# Altium PCB Atari_Controller.PcbDoc
Units mm, origin at the board's own origin, x right, y up, seen from the top; angles counter-clockwise.
Board outline 108.57 x 40.1 mm, 2 copper layers (Top Layer, Bottom Layer); 99 components, 57 nets, 285 pads, 144 vias.
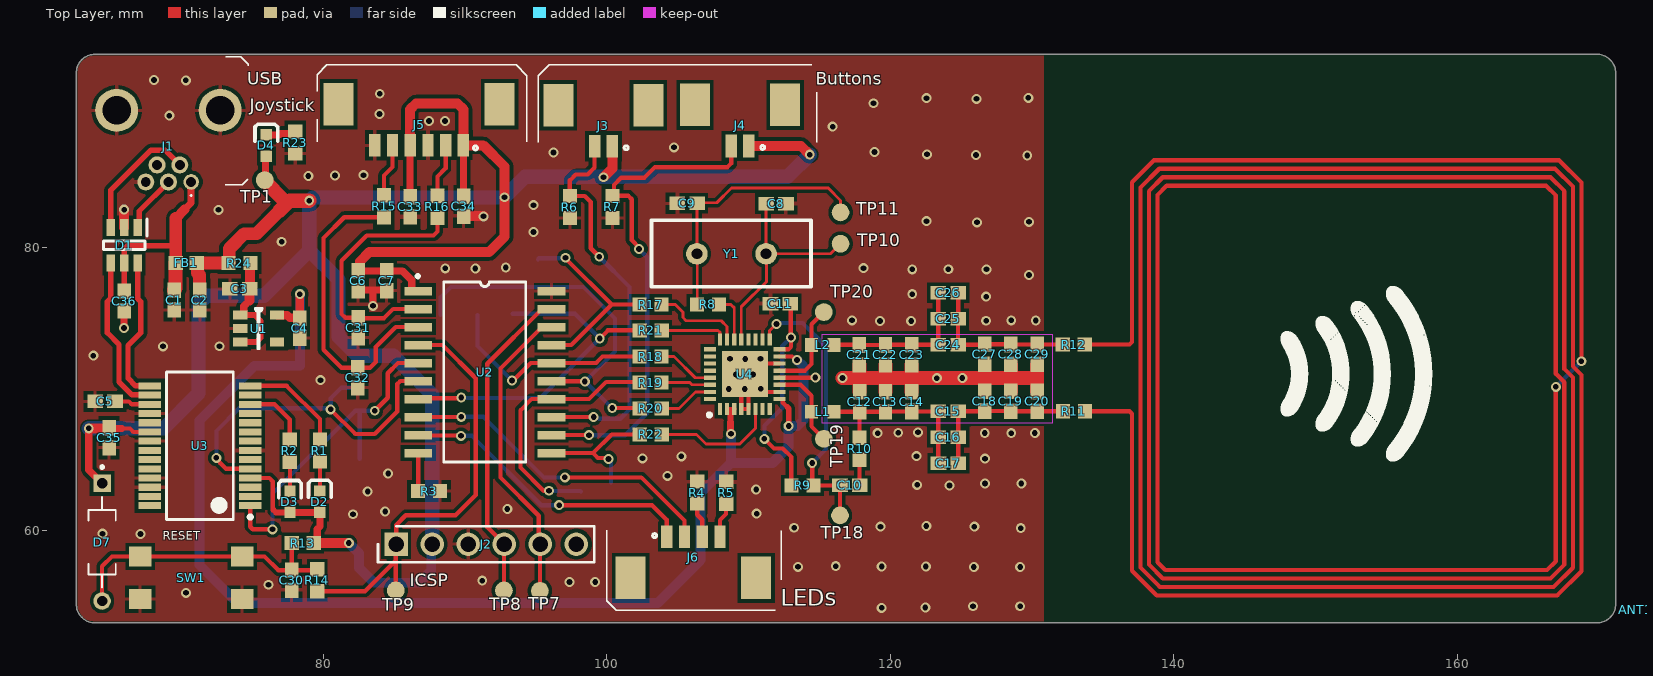
[diagram p0: Top Layer view]
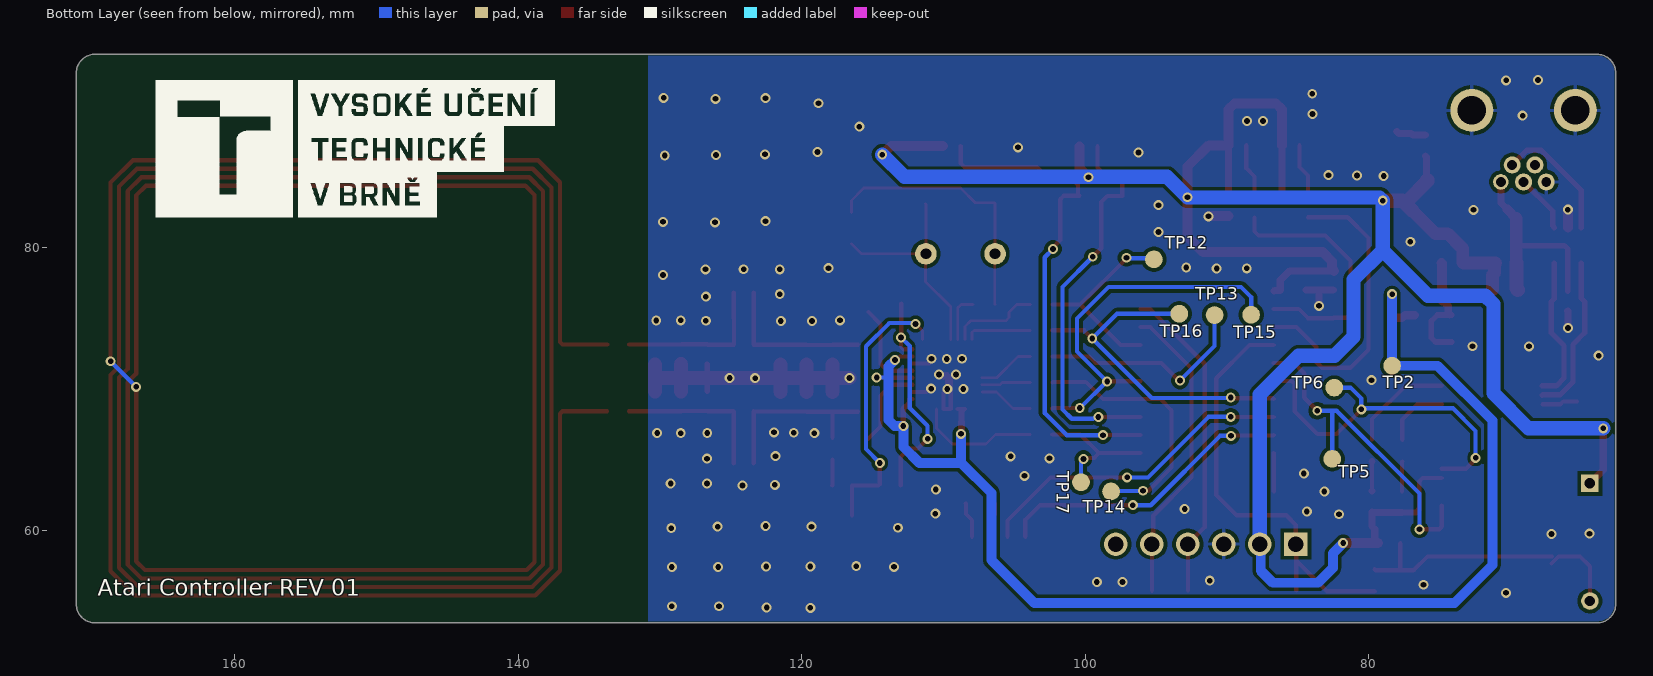
[diagram p1: Bottom Layer view, seen from below]
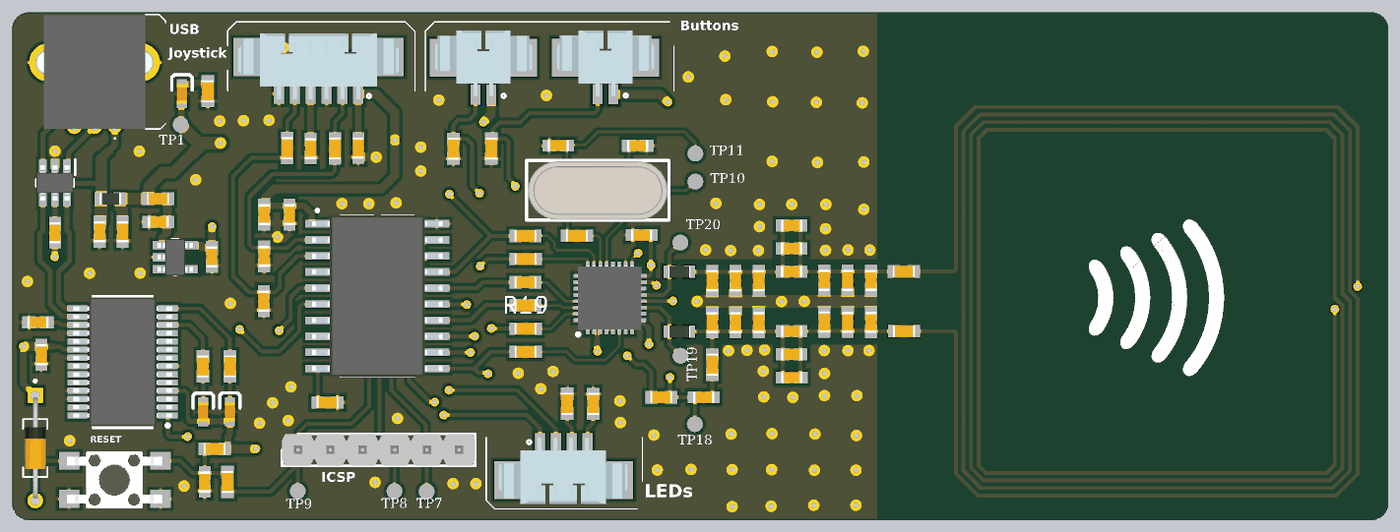
[diagram p2: 3D render of the assembled board from above, using the file's embedded part models]

## Layer stack, top to bottom
Top Solder: solder mask 0.0102, Solder Resist, Dk 3.5
Top Layer: signal copper 0.0356
Dielectric 1: dielectric 0.32, FR-4, Dk 4.8
Bottom Layer: signal copper 0.0356
Bottom Solder: solder mask 0.0102, Solder Resist, Dk 3.5

## Board outline
62.6,54.83 62.6,92.29 cw(c63.92,92.29) 63.92,93.61 169.91,93.61 169.924,93.608 cw(c169.85,92.29) 171.17,92.29 171.17,54.83 cw(c169.85,54.83) 169.85,53.51 63.921,53.51 63.908,53.51 cw(c63.92,54.83)

## Design rules (kind name [scope] priority, off if disabled: settings)
Clearance [All] p1: gap=0.254 ignorepadtopadclearanceinfootprint=FALSE except(0: Arc-Hole Track-Hole SMDPad-Hole THPad-Hole Via-Hole Fill-Hole Poly-Hole Region-Hole Text-Hole; 0.1: Text-Text; 0.15: Arc-Arc Arc-Track Arc-SMDPad Track-Track Track-SMDPad SMDPad-SMDPad; 0.24: THPad-THPad)
DiffPairsRouting [All] p1: maxlimit=0.254 minlimit=0.254 mostfreqgap=0.254 toplayer_minwidth=0.381 toplayer_maxwidth=0.381 toplayer_prefwidth=0.381 bottomlayer_minwidth=0.381 bottomlayer_maxwidth=0.381 bottomlayer_prefwidth=0.381 maxuncoupledlength=12.7
MinimumSolderMaskSliver [All] p1: minsoldermaskwidth=0.03
PlaneConnect [All] p1: planeconnectstyle=Direct reliefexpansion=0.508 reliefentries=4 reliefconductorwidth=0.254 reliefairgap=0.254
PolygonConnect VIA [IsVia AND InNet('GND')] p1: connectstyle=Direct reliefconductorwidth=0.254 reliefentries=4 polygonreliefangle="90 Angle" airgapwidth=0.254
PolygonConnect [All] p2: connectstyle=Relief reliefconductorwidth=0.254 reliefentries=4 polygonreliefangle="90 Angle" airgapwidth=0.254
RoutingVias [All] p1: holewidth=0.4 width=0.7 viastyle="Through Hole" minholewidth=0.3 minwidth=0.6 maxholewidth=0.6 maxwidth=1
SilkToSilkClearance [All] p1: silktosilkclearance=0.1
SilkToSolderMaskClearance [IsPad] p1: minsilkscreentomaskgap=0.1 clearancetoexposedcopper=TRUE
SolderMaskExpansion [All] p1: expansion=0.102 istentingtop=FALSE
UnRoutedNet [All] p1: checkbadconnections=TRUE
Width [All] p1: maxlimit=1 minlimit=0.15 preferedwidth=0.2 minimp=50.000000 maximp=50.000000 favimp=50.000000
24 further rules are at their usual default settings.

## Classes and differential pairs
differential pair USB_D: +USB_D_P -USB_D_N
differential pair Conn_D: +Conn_D_P -Conn_D_N

## Components (designator, comment, footprint, x,y, rotation, side; value= is the part's Value field where it differs from the comment)
ANT1 "RFID_Antenna" RFID_Antenna 172.59,54.43 r90 top
C1 "10n" CAP_0603 69.506,76.28 r90 top
C2 "4u7" CAP_0603 71.316,76.28 r90 top
C3 "1u" CAP_0603 74.13,77.06 r0 top
C4 "1u" CAP_0603 78.35,74.3 r90 top
C5 "100n" CAP_0603 64.63,69.124 r0 top
C6 "4u7" CAP_0603 82.48,77.64 r90 top
C7 "100n" CAP_0603 84.48,77.64 r90 top
C8 "10p" CAP_0603 111.95,83.07 r180 top
C9 "10p" CAP_0603 105.68,83.1 r0 top
C10 "1n" CAP_0603 117.16,63.201 r180 top
C11 "100n" CAP_0603 112.26,76.02 r180 top
C12 "75p" CAP_0603 117.84,69.106 r270 top
C13 "47p" CAP_0603 119.67,69.106 r270 top
C14 "NC" CAP_0603 121.51,69.116 r270 top
C15 "39p" CAP_0603 124.1,68.43 r0 top
C16 "NC" CAP_0603 124.1,66.6 r0 top
C17 "NC" CAP_0603 124.11,64.77 r0 top
C18 "180p" CAP_0603 126.68,69.15 r270 top
C19 "16p" CAP_0603 128.52,69.14 r270 top
C20 "NC" CAP_0603 130.36,69.13 r270 top
C21 "75p" CAP_0603 117.83,72.41 r270 top
C22 "47p" CAP_0603 119.67,72.41 r270 top
C23 "NC" CAP_0603 121.51,72.42 r270 top
C24 "39p" CAP_0603 124.09,73.13 r0 top
C25 "NC" CAP_0603 124.09,74.96 r0 top
C26 "NC" CAP_0603 124.1,76.79 r0 top
C27 "180p" CAP_0603 126.67,72.454 r270 top
C28 "16p" CAP_0603 128.52,72.444 r270 top
C29 "NC" CAP_0603 130.36,72.44 r270 top
C30 "100n" CAP_0603 77.79,56.52 r90 top
C31 "100n" CAP_0603 82.48,74.336 r90 top
C32 "100n" CAP_0603 82.45,70.8 r90 top
C33 "100n" CAP_0603 86.15,82.85 r90 top
C34 "100n" CAP_0603 89.91,82.892 r90 top
C35 "100n" CAP_0603 64.91,66.57 r90 top
C36 "100n" CAP_0603 65.98,76.21 r90 top
D1 "USBLC6-2SC6" SOT-666 65.976,80.14 r270 top
D2 "SMD-GREEN" LED_0603 79.778,62.06 r270 top
D3 "SMD-GREEN" LED_0603 77.67,62.05 r270 top
D4 "SMD-RED" LED_0603 76,87.18 r270 top
D7 "1N4148" 1N4148 64.42,59.2 r270 top
FB1 "120R @ 100 MHz" Ferrite_Bead_0603 70.346,78.9 r0 top
J1 "UB-M5BR-DM14-4D" USB-B-MINI 69.1,87.13 r180 top
J2 "ICSP Programmer" 6_pin_2.54 91.51,59.06 r0 top
J3 "532610271" Molex_Picoblade_2pin 99.78,88.57 r180 top
J4 "532610271" Molex_Picoblade_2pin 109.41,88.59 r180 top
J5 "532610671" Molex_Picoblade_6pin 86.775,88.64 r180 top
J6 "532610471" MOLEX_PICOBLADE_4Pin 106.12,58.13 r0 top
L1 "470n" IND_0603 115.24,68.4 r0 top
L2 "470n" IND_0603 115.24,73.12 r0 top
R1 "330R" RES_0603 79.78,65.66 r270 top
R2 "330R" RES_0603 77.65,65.65 r270 top
R3 "10k" RES_0603 87.48,62.8 r180 top
R4 "330R" RES_0603 106.39,62.7 r270 top
R5 "330R" RES_0603 108.44,62.69 r270 top
R6 "10k" RES_0603 97.41,82.84 r90 top
R7 "10k" RES_0603 100.41,82.85 r90 top
R8 "0R" RES_0603 107.15,75.97 r0 top
R9 "1k" RES_0603 113.82,63.2 r0 top
R10 "15k" RES_0603 117.84,65.785 r270 top
R11 "1R3" RES_0603 132.96,68.43 r180 top
R12 "1R3" RES_0603 132.95,73.14 r0 top
R13 "10k" RES_0603 78.57,59.134 r0 top
R14 "10k" RES_0603 79.594,56.52 r90 top
R15 "10k" RES_0603 84.301,82.89 r90 top
R16 "10k" RES_0603 88.07,82.86 r90 top
R17 "0R" RES_0603 103.1,75.96 r0 top
R18 "0R" RES_0603 103.1,72.29 r0 top
R19 "0R" RES_0603 103.1,70.46 r0 top
R20 "0R" RES_0603 103.11,68.63 r0 top
R21 "0R" RES_0603 103.11,74.14 r0 top
R22 "0R" RES_0603 103.11,66.8 r180 top
R23 "330R" RES_0603 78.04,87.38 r90 top
R24 "0R" RES_0603 74.11,78.89 r0 top
SW1 "SPST_Switch" Tactile_Switch_4.5x4.5 70.7,56.69 r0 top
TP1 "TestPoint" Pad_2.5mm#1 75.89,84.74 r90 bottom
TP2 "TestPoint" Pad_2.5mm#2 78.365,71.645 r90 bottom
TP5 "TestPoint" Pad_2.5mm#2 82.59,65.08 r90 bottom
TP6 "TestPoint" Pad_2.5mm#2 82.45,70.1 r90 bottom
TP7 "TestPoint" Pad_2.5mm#2 95.3,55.77 r90 top
TP8 "TestPoint" Pad_2.5mm#2 92.76,55.8 r90 top
TP9 "TestPoint" Pad_2.5mm#2 85.13,55.8 r90 top
TP10 "TestPoint" Pad_2.5mm#2 116.5,80.25 r0 top
TP11 "TestPoint" Pad_2.5mm#2 116.5,82.46 r0 top
TP12 "TestPoint" Pad_2.5mm#2 95.17,79.15 r90 bottom
TP13 "TestPoint" Pad_2.5mm#2 90.89,75.22 r90 bottom
TP14 "TestPoint" Pad_2.5mm#2 98.19,62.78 r90 bottom
TP15 "TestPoint" Pad_2.5mm#2 88.31,75.24 r90 bottom
TP16 "TestPoint" Pad_2.5mm#2 93.38,75.31 r90 bottom
TP17 "TestPoint" Pad_2.5mm#2 100.31,63.43 r90 bottom
TP18 "TestPoint" Pad_2.5mm#2 116.46,61.09 r90 top
TP19 "TestPoint" Pad_2.5mm#2 115.33,66.49 r90 top
TP20 "TestPoint" Pad_2.5mm#2 115.32,75.43 r90 top
U1 "MIC5504" SOT-23-5 75.46,74.27 r0 top
U2 "PIC18F15Q40" SOP20 91.41,71.2 r0 top
U3 "FT232RNL" SOP65P780X200-28N 71.32,66 r180 top
U4 "MFRC52202HN1,115" PQFN50P500X500X100_HS-33N 109.75,71.05 r90 top
Y1 "27.12 MHz" CrystalOscillator 108.81,79.54 r180 top

## Footprints (in the part's own frame and the unit in brackets; to place one, negate y for a bottom-side part, rotate by r counter-clockwise, add the part's x,y. Pads: shape width x height; smd on the part's side, far side on the other; paste and mask are expansions set on the pad)
1N4148 [mm]
  rect 1.238x1.238 / inner round 1.238 / far side rect 1.238x1.238 hole 0.73: 1(-4.146,0)
  round 1.238 hole 0.73: 2(4.146,0)
  silkscreen extent -5.4,-0.96 3.2,0.96, body extent -4.01,-0.8 4.01,0.84, height 1.65
6_pin_2.54 [mm]
  rect 1.65x1.65 / inner round 1.65 / far side rect 1.65x1.65 hole 1.1: 1(-6.35,0)
  round 1.65 hole 1.1: 2(-3.81,0) 3(-1.27,0) 4(1.27,0) 5(3.81,0) 6(6.35,0)
  silkscreen extent -7.62,-1.27 7.62,1.27, body extent -7.62,-1.25 7.62,1.25, height 9.26
CAP_0603 [mm] "CAP_0603"
  rect 1.1x0.95 smd mask+0.05: 1(-0.7,0) 2(0.7,0)
  body extent -0.85,-0.45 0.85,0.45, height 0.9
CrystalOscillator [mil] "Crystal Oscillator THT"
  round 60 hole 30: 1(-96.06,0) 2(96.06,0)
  silkscreen extent -221,-93 222,92, body extent -218,-92 218,92, height 138
Ferrite_Bead_0603 [mm]
  rect 1.02x0.98 smd: 1(-0.74,0) 2(0.74,0)
  body extent -0.87,-0.48 0.88,0.48, height 0.95
IND_0603 [mm] "Chip Inductor, 2-Leads, Body 1.60x0.80mm, IPC Medium Density"
  rect 0.92x0.98 smd: 1(-0.79,0) 2(0.79,0)
  body extent -0.87,-0.48 0.87,0.48, height 0.95
LED_0603 [mm]
  rect 0.8x0.8 smd: 1(-0.75,0) 2(0.75,0)
  silkscreen extent -1.5,-0.8 -0.3,0.8, body extent -0.8,-0.4 0.8,0.4, height 0.6
Molex_Picoblade_2pin [mm]
  rect 0.8x1.6 smd: 1(-0.625,1.45) 2(0.625,1.45)
  rect 2.1x3 smd: P1(-3.175,-1.45) P2(3.175,-1.45)
  silkscreen extent -1.74,1.41 -1.46,1.69, body extent -3.83,-3.6 3.83,1.6, height 3.41
MOLEX_PICOBLADE_4Pin [mm]
  rect 0.8x1.6 smd: 1(-1.875,1.45) 2(-0.625,1.45) 3(0.625,1.45) 4(1.875,1.45)
  rect 2.1x3 smd: SH1(-4.425,-1.45) SH2(4.425,-1.45)
  silkscreen extent -2.87,1.39 -2.59,1.68, body extent -5.12,-3.33 5.02,1.87, height 3.2
Molex_Picoblade_6pin [mm]
  rect 0.8x1.6 smd mask+0.076: 1(-3.125,1.45) 2(-1.875,1.45) 3(-0.625,1.45) 4(0.625,1.45) 5(1.875,1.45) 6(3.125,1.45)
  rect 2.1x3 smd mask+0.076: S1(-5.675,-1.45) S2(5.675,-1.45)
  silkscreen extent -4.12,1.49 -3.83,1.78, body extent -6.32,-3.3 6.32,1.9, height 3.2
Pad_2.5mm#1 [mm]
  round 1.25 smd far side mask+0.05: 1(0,0)
Pad_2.5mm#2 [mm]
  round 1.25 smd mask+0.05: 1(0,0)
PQFN50P500X500X100_HS-33N [mm] "PQFN, 32-Leads, Body 5.00x5.00mm, Pitch 0.50mm, Thermal Pad 3.10x3.10mm, IPC Medium Density"
  rect 0.85x0.3 smd mask+0.05: 1(-2.45,1.75) 2(-2.45,1.25) 3(-2.45,0.75) 4(-2.45,0.25) 5(-2.45,-0.25) 6(-2.45,-0.75) 7(-2.45,-1.25) 8(-2.45,-1.75) 17(2.45,-1.75) 18(2.45,-1.25) 19(2.45,-0.75) 20(2.45,-0.25) 21(2.45,0.25) 22(2.45,0.75) 23(2.45,1.25) 24(2.45,1.75)
  rect 0.3x0.85 smd mask+0.05: 9(-1.75,-2.45) 10(-1.25,-2.45) 11(-0.75,-2.45) 12(-0.25,-2.45) 13(0.25,-2.45) 14(0.75,-2.45) 15(1.25,-2.45) 16(1.75,-2.45) 25(1.75,2.45) 26(1.25,2.45) 27(0.75,2.45) 28(0.25,2.45) 29(-0.25,2.45) 30(-0.75,2.45) 31(-1.25,2.45) 32(-1.75,2.45)
  rect 3.25x3.25 smd mask+0.05: 33(0,0)
  silkscreen extent -3,2.37 -2.75,2.62, body extent -2.55,-2.55 2.55,2.55, height 1
RES_0603 [mm] "RES_0603"
  rect 1x1 smd mask+0.05: 1(-0.775,0) 2(0.775,0)
  body extent -0.87,-0.48 0.87,0.48, height 0.55
RFID_Antenna [mm]
SOP20 [mm]
  rect 1.95x0.6 smd mask+0.05: 1(-4.7,5.715) 2(-4.7,4.445) 3(-4.7,3.175) 4(-4.7,1.905) 5(-4.7,0.635) 6(-4.7,-0.635) 7(-4.7,-1.905) 8(-4.7,-3.175) 9(-4.7,-4.445) 10(-4.7,-5.715) 11(4.7,-5.715) 12(4.7,-4.445) 13(4.7,-3.175) 14(4.7,-1.905) 15(4.7,-0.635) 16(4.7,0.635) 17(4.7,1.905) 18(4.7,3.175) 19(4.7,4.445) 20(4.7,5.715)
  silkscreen extent -4.82,-6.35 2.89,6.85, body extent -5.15,-6.4 5.15,6.4, height 2.65
SOP65P780X200-28N [mm] "SOP, 28-Leads, Body 10.20x5.30mm, Pitch 0.65mm, IPC Medium Density"
  rect 1.6x0.5 smd mask+0.05: 1(-3.55,4.225) 2(-3.55,3.575) 3(-3.55,2.925) 4(-3.55,2.275) 5(-3.55,1.625) 6(-3.55,0.975) 7(-3.55,0.325) 8(-3.55,-0.325) 9(-3.55,-0.975) 10(-3.55,-1.625) 11(-3.55,-2.275) 12(-3.55,-2.925) 13(-3.55,-3.575) 14(-3.55,-4.225) 15(3.55,-4.225) 16(3.55,-3.575) 17(3.55,-2.925) 18(3.55,-2.275) 19(3.55,-1.625) 20(3.55,-0.975) 21(3.55,-0.325) 22(3.55,0.325) 23(3.55,0.975) 24(3.55,1.625) 25(3.55,2.275) 26(3.55,2.925) 27(3.55,3.575) 28(3.55,4.225)
  silkscreen extent -3.68,-5.2 2.35,5.2, body extent -3.9,-5.1 3.9,5.1, height 2
SOT-23-5 [mm]
  rect 1x0.66 smd mask+0.05: 1(-1.3,0.95) 2(-1.3,0) 3(-1.3,-0.95) 4(1.3,-0.95) 5(1.3,0.95)
  silkscreen extent -0.24,-1.43 0.24,1.43, body extent -1.4,-1.45 1.4,1.45, height 1.45
SOT-666 [mm]
  rect 1.2x0.6 smd mask+0.05: 1(-1.25,0.95) 2(-1.25,0) 3(-1.25,-0.95) 4(1.25,-0.95) 5(1.25,0) 6(1.25,0.95)
  silkscreen extent -1.85,-1.46 0.3,1.6, body extent -1.4,-1.46 1.4,1.46, height 1.45
Tactile_Switch_4.5x4.5 [mm]
  rect 1.6x1.4 smd mask+0.05: 1(-3.6,-1.5) 1(3.6,-1.5) 2(-3.6,1.5) 2(3.6,1.5)
  body extent -3.78,-2.26 3.72,2.24, height 3.8
USB-B-MINI [mm]
  round 1.1 hole 0.7: 1(-1.6,2.525)
  round 1.2 hole 0.7: 2(-0.8,1.325) 3(0,2.525) 4(0.8,1.325) 5(1.6,2.525)
  round 3.03 hole 2.02: MH1(-3.65,-2.525) MH2(3.65,-2.525)
  silkscreen extent -1.65,3.43 -1.55,3.53, body extent -4.56,-6.27 4.56,2.77, height 4

## Part data
ANT1: "Matching for MRFC522"
C1 C2 C3 C4 C6 C7 C8 C9 C10 C11 C12 C13 C14 C15 C16 C17 C18 C19 C20 C21 C22 C23 C24 C25 C26 C27 C28 C29 C31 C32 C33 C34 C36: library part CAP_0603_16V, "Capacitor SMD 0603 16V"
C5 C30 C35: library part CAP_0603_10V, "Capacitor SMD 0603 10V"
D1: "ESD Suppressors / TVS Diodes ESD Protection Low Cap", ComponentLink1Description=TME, ComponentLink1URL=https://www.tme.eu/cz/details/usblc6-2sc6/ochranne-diody-site/stmicroelectronics/, LINK=https://www.tme.eu/cz/details/usblc6-2sc6/ochranne-diody-site/stmicroelectronics/, Part ID=USBLC6-2SC6
D2 D3 D4: library part LED_0603, "LED SMD 0603", ComponentLink1Description=TME
  D2 D3: ComponentLink1URL=https://www.tme.eu/cz/details/osg50603c1e/diody-led-smd-barevne/optosupply/, LINK=https://www.tme.eu/cz/details/osg50603c1e/diody-led-smd-barevne/optosupply/, Part ID=OSG50603C1E
  D4: ComponentLink1URL=https://www.tme.eu/cz/details/kph-1608id/diody-led-smd-barevne/kingbright-electronic/, LINK=https://www.tme.eu/cz/details/kph-1608id/diody-led-smd-barevne/kingbright-electronic/, Part ID=KPH-1608ID
D7: "THT; 100V; 0,2A; Ifsm: 1A; DO35; Ufmax: 1V; 4ns", ComponentLink1Description=TME, ComponentLink1URL=https://www.tme.eu/cz/details/1n4148-fai/univerzalni-diody-tht/onsemi/1n4148/, LINK=https://www.tme.eu/cz/details/1n4148-fai/univerzalni-diody-tht/onsemi/1n4148/, Part ID=1N4148
FB1: library part FERRITE_BEAD_0603, "Ferrite Bead 0603", ComponentLink1Description=TME, ComponentLink1URL=https://www.tme.eu/en/details/blm18pg121sh1d/ferrite-beads/murata/, LINK=https://www.tme.eu/en/details/blm18pg121sh1d/ferrite-beads/murata/, Part ID=BLM18PG121SH1D
J1: library part USB-B-MINI, ComponentLink1Description=TME, ComponentLink1URL=https://www.tme.eu/cz/details/ub-m5br-dm14-4d/konektory-usb-a-ieee1394/jst/ub-m5br-dm14-4d-lf-sn-l/, LINK=https://www.tme.eu/cz/details/ub-m5br-dm14-4d/konektory-usb-a-ieee1394/jst/ub-m5br-dm14-4d-lf-sn-l/, Part ID="UB-M5BR-DM14-4D (LF)(SN)(L)"
J2: library part "6-pin header 2.54mm", "6 pin male header 2.54mm"
J3 J4: library part PicoBlade_2, "Zásuvka; kabel-pl.spoj; vidlice; PicoBlade™; 1,25mm; PIN: 2; SMT; 1A", ComponentLink1Description=TME, ComponentLink1URL=https://www.tme.eu/cz/details/mx-53261-0271/signalove-konektory-raster-1-25mm/molex/532610271/, LINK=https://www.tme.eu/cz/details/mx-53261-0271/signalove-konektory-raster-1-25mm/molex/532610271/, Part ID=532610271
J5: library part PicoBlade_6, "Zásuvka; kabel-pl.spoj; vidlice; PicoBlade™; 1,25mm; PIN: 6; SMT; 1A", ComponentLink1Description=TME, ComponentLink1URL=https://www.tme.eu/cz/details/mx-53261-0671/signalove-konektory-raster-1-25mm/molex/532610671/, LINK=https://www.tme.eu/cz/details/mx-53261-0671/signalove-konektory-raster-1-25mm/molex/532610671/, Part ID=532610671
J6: library part PicoBlade_4, "Zásuvka; kabel-pl.spoj; vidlice; PicoBlade™; 1,25mm; PIN: 4; SMT; 1A", ComponentLink1Description=TME, ComponentLink1URL=https://www.tme.eu/cz/details/mx-53261-0471/signalove-konektory-raster-1-25mm/molex/532610471/, LINK=https://www.tme.eu/cz/details/mx-53261-0471/signalove-konektory-raster-1-25mm/molex/532610471/, Part ID=532610471
L1 L2: library part IND_0603, "Inductor 0603 SMD", ComponentLink1Description=Mouser, ComponentLink1URL=https://cz.mouser.com/ProductDetail/TAIYO-YUDEN/LBCNF1608KKTR47MAD?qs=tlsG%2FOw5FFhdrRySDrBNfg%3D%3D, LINK=https://cz.mouser.com/ProductDetail/TAIYO-YUDEN/LBCNF1608KKTR47MAD?qs=tlsG%2FOw5FFhdrRySDrBNfg%3D%3D, Part ID=LBCNF1608KKTR47MAD
R1 R2 R3 R4 R5 R6 R7 R8 R9 R10 R11 R12 R13 R14 R15 R16 R17 R18 R19 R20 R21 R22 R23 R24: library part RES_0603, "Resistor SMD 0603"
SW1: "SPST-NO Tactile Switch 4.5x4.5", ComponentLink1Description=TME, ComponentLink1URL=https://www.tme.eu/cz/details/tl3305af160qg/mikrospinace-tact/e-switch/, LINK=https://www.tme.eu/cz/details/tl3305af160qg/mikrospinace-tact/e-switch/, Part ID=TL3305AF160QG
U1: library part MIC5504-3.3YM5-TR, "LDO regulator 3.3V", ComponentLink1Description=Mouser, ComponentLink1URL=https://cz.mouser.com/ProductDetail/Microchip-Technology/MIC5504-3.3YM5-TR?qs=U6T8BxXiZAUmVQ5Zs217qQ%3D%3D, ComponentLink2Description=Datasheet, ComponentLink2URL=https://cz.mouser.com/datasheet/2/268/MIC550X-1082389.pdf, LINK=https://cz.mouser.com/ProductDetail/Microchip-Technology/MIC5504-3.3YM5-TR?qs=U6T8BxXiZAUmVQ5Zs217qQ%3D%3D, Part ID=MIC5504-3.3YM5-TR
U2: "PIC18F04/05/14/15Q40 14/20-Pin, Low-Power, High-Performance Microcontroller", ComponentLink1Description=Microchip, ComponentLink1URL=https://www.microchip.com/en-us/product/pic18f15q40, ComponentLink2Description=TME, ComponentLink2URL=https://www.tme.eu/cz/details/pic18f15q40-i_so/rodina-pic-8-bitu/microchip-technology/, LINK=https://www.tme.eu/cz/details/pic18f15q40-i_so/rodina-pic-8-bitu/microchip-technology/, Part ID=PIC18F15Q40-I/SO
U3: "USB Interface IC USB Full Speed to Serial UART IC, Includes Oscillator and EEPROM, SSOP-28", ComponentLink1Description=TME, ComponentLink1URL=https://www.tme.eu/cz/details/ft232rnl/integrovane-obvody-interface-usb/ftdi/ft232rnl-reel/, LINK=https://www.tme.eu/cz/details/ft232rnl/integrovane-obvody-interface-usb/ftdi/ft232rnl-reel/, Part ID=FT232RNL-REEL
U4: "NFC/RFID Tags & Transponders Standard performance MIFARE and NTAG frontend", ComponentLink1Description=Mouser, ComponentLink1URL=https://cz.mouser.com/ProductDetail/NXP-Semiconductors/MFRC52202HN1115?qs=cbprxTG2Yq%2F%252BkR%2FEgMbBLA%3D%3D, LINK=https://cz.mouser.com/ProductDetail/NXP-Semiconductors/MFRC52202HN1115?qs=cbprxTG2Yq%2F%252BkR%2FEgMbBLA%3D%3D, Part ID=MFRC52202HN1,115
Y1: library part Crystal_Oscillator, "Crystal oscillator", ComponentLink1Description=Mouser, ComponentLink1URL=https://cz.mouser.com/ProductDetail/IQD/LFXTAL036075Bulk?qs=e4%2FAndAAwgJjgKMHylwuSw%3D%3D, LINK=https://cz.mouser.com/ProductDetail/IQD/LFXTAL036075Bulk?qs=e4%2FAndAAwgJjgKMHylwuSw%3D%3D, Part ID=LFXTAL036075Bulk

## Via types
v1: diameter 0.7, hole 0.4, Top Layer to Bottom Layer, 144 vias

## Nets (pads, with @x,y where several pads share a name; then routed paths per layer and width w, separated by ;. In a path a pad name is that pad's centre, name@x,y a point inside that pad or via, vN(x,y) a via of type N, cw(c..) or ccw(c..) an arc to the next point about the centre after c; other vN are vias at no path point)
+3V3: C4.2 TP2.1 U1.5 U4.2 U4.3 U4.9 U4.12 U4.15 | length 95.8
  Top Layer w0.3: U4.2 U4.2@108.506,68.6 ; 108.74,68.366 U4.2@108.506,68.6 ; U4.3 U4.2@108.506,68.6 ; U4.9 112.43,69.3 112.43,69.04 112.73,68.74 ; U4.12 114.706,70.8 v1(114.726,70.82) ; U4.15 113.076,72.3 113.322,72.054 v1(113.43,72.054)
  Top Layer w0.4: 108.74,67.67 108.74,68.366 ; 112.73,68.74 112.84,68.63 v1(112.84,67.4)
  Top Layer w0.5: 108.74,67.67 108.742,67.668 108.742,66.878 v1(108.78,66.84)
  Top Layer w0.6: U1.5 76.79,75.19 77.49,75.19 77.64,75.04 78.31,75.04 C4.2 78.36,75.01 78.36,76.68 v1(78.37,76.69)
  Bottom Layer w0.3: 113.88,70.82 v1(114.726,70.82)
  Bottom Layer w0.7: v1(78.37,76.69) 78.37,71.65 TP2.1 75.165,71.645 71.3,67.78 71.3,57.59 73.98,54.91 103.61,54.91 106.63,57.93 106.63,62.66 108.77,64.8 ; v1(108.78,66.84) 108.77,66.83 108.77,64.8 ; v1(113.43,72.054) 113.88,71.604 113.88,70.82 113.88,67.81 113.47,67.4 v1(112.84,67.4) 112.84,65.92 111.72,64.8 108.77,64.8
+5: C2.2 C6.2 C7.2 C33.2 C34.2 C35.2 D2.2 D3.2 D4.2 D7.1 FB1.2 J2.2 J3.1 J4.1 J5.1 J5.4 R13.2 R24.1 TP1.1 U2.1 U3.4 U3.20 | length 186
  Top Layer w0.3: 65.83,67.21 66.39,67.21 66.625,66.975 U3.20 ; U3.4 76.215,63.725 76.46,63.48 76.46,61.52 76.51,61.47
  Top Layer w0.4: 76.51,61.47 76.68,61.3 D3.2
  Top Layer w0.5: v1(63.48,67.23) 63.48,64.286 D7.1 ; C35.2 64.97,67.21 65.83,67.21 ; TP1.1 75.945,84.795 75.945,86.375 D4.2 ; D3.2 77.675,61.305 79.773,61.305 D2.2 79.778,60.308 79.595,60.125 79.595,59.384 R13.2 ; C6.2 C7.2 85.59,78.34 86.258,77.672 86.258,76.965 86.66,76.965 U2.1 ; C33.2@86.13,83.59 86.14,83.6 86.14,87.18 J5.4 ; J5.1 89.905,87.185 89.905,83.597 C34.2
  Top Layer w0.7: v1(63.48,67.23) 64.87,67.23 C35.2 ; R13.2 81.814,59.134 v1(81.82,59.14) ; C6.2 82.605,78.465 82.605,79.005 83.26,79.66 91.72,79.66 92.8,80.74 v1(92.8,83.53) 92.8,85.69 91.3,87.19 J5.1 89.9,89.73 89.49,90.14 86.56,90.14 86.15,89.73 J5.4 ; v1(99.78,84.94) 100.405,85.565 J3.1 ; J4.1 113.72,87.14 v1(114.33,86.53)
  Top Layer w0.9: C2.2 71.291,77.005 71.291,78.049 71.146,78.194 71.146,78.86 71.106,78.9 FB1.2 R24.1@73.325,78.9 ; R24.1 73.385,78.94 73.385,79.895 74.45,80.96 75.33,80.96 76.94,82.57
  Top Layer w1: TP1.1 75.89,84.672 77.295,83.267 77.295,82.925 ; 76.94,82.57 77.295,82.925 ; v1(79.03,83.29) 79.02,83.28 77.65,83.28 77.295,82.925
  Bottom Layer w0.7: v1(81.82,59.14) 82.55,58.41 82.55,57.39 83.6,56.34 86.79,56.34 87.635,57.185 87.635,58.995 J2.2
  Bottom Layer w1: v1(63.48,67.23) 68.74,67.23 71.22,69.71 71.22,75.994 71.806,76.58 75.83,76.58 79.03,79.78 ; J2.2 87.7,69.62 84.97,72.35 82.43,72.35 81.09,73.69 81.09,77.72 79.03,79.78 ; v1(114.33,86.53) 112.77,84.97 94.24,84.97 v1(92.8,83.53) 92.78,83.51 79.25,83.51 v1(79.03,83.29) 79.03,79.78
+VBUS: C1.2 C36.2 D1.5 FB1.1 J1.1 | length 15.1
  Top Layer w0.4: C36.2 C36.2 65.978,78.888 D1.5 65.976,79.876 66.21,80.11 69.6,80.11 69.62,80.09 ; 69.396,77.84 69.606,78.05
  Top Layer w0.5: 70.24,82.66 70.699,83.119 J1.1@70.699,84.604
  Top Layer w0.7: 69.62,82.04 70.24,82.66
  Top Layer w0.9: FB1.1 69.62,78.914 69.62,80.09 69.62,82.04
  Top Layer w1: C1.2 69.506,77.005 69.606,77.105 69.606,78.05 FB1.1
Button_1: J3.2 R6.2 U2.13 | length 28
  Top Layer w0.3: U2.13 96.113,68.028 99.088,68.028 v1(99.09,68.03) ; J3.2 99.155,85.615 98.67,85.13 97.82,85.13 97.41,84.72 R6.2 98.465,83.615 98.88,83.2 98.88,79.93 v1(99.48,79.33)
  Bottom Layer w0.3: v1(99.09,68.03) 99.167,67.953 99.418,67.953 99.466,67.906 100.966,67.906 101.61,68.55 101.61,77.2 v1(99.48,79.33)
Button_2: J4.2 R7.2 U2.12 | length 35.2
  Top Layer w0.3: U2.12 96.112,66.753 98.758,66.753 v1(98.76,66.75) ; R7.2 100.519,83.734 100.519,84.399 101.03,84.91 102.68,84.91 103.42,85.65 108.53,85.65 108.785,85.905 J4.2 ; R7.2@100.519,83.625 101.535,83.625 101.77,83.39 101.77,80.508 102.29,79.988 v1(102.29,79.88)
  Bottom Layer w0.3: v1(98.76,66.75) 101.32,66.75 102.87,68.3 102.87,79.3 v1(102.29,79.88)
Conn_D_N: D1.3 J1.2 | length 9.1
  Top Layer w0.381: D1.3 65.026,84.008 67.867,86.85 68.855,86.85 J1.2
Conn_D_P: D1.1 J1.3 | length 4.1
  Top Layer w0.381: D1.1 67.035,81.499 67.035,82.54 J1.3
FT_3V3OUT: C5.2 U3.17 | length 2.5
  Top Layer w0.3: C5.2 66.306,69.124 66.505,68.925 U3.17
GND: C1.1 C2.1 C3.1 C4.1 C5.1 C6.1 C7.1 C8.1 C9.1 C11.2 C12.1 C13.1 C14.1 C18.1 C19.1 C20.1 C21.2 C22.2 C23.2 C27.2 C28.2 C29.2 C30.1 C31.1 C32.1 C33.1 C34.1 C35.1 C36.1 D1.2 J1.5 J1.MH1 J1.MH2 J2.3 J5.3 J5.6 R3.1 R4.1 R5.1 R6.1 R7.1 R23.1 SW1.1 U1.2 U2.20 U3.7 U3.18 U3.21 U3.25 U3.26 U4.4 U4.5 U4.10 U4.14 U4.18 U4.33 | length 40.5
  Top Layer w0.3: v1(109.74,70) U4.33@109.75,70.01 ; U4.33@110,70.8 U4.33@110.01,70.8 ; v1(110.32,71.03) 110.3,71.05 U4.33 ; U4.33@111,71.8 U4.14 ; U4.33@111.225,69.8 U4.10 ; U4.33@109.75,70.01 110,69.76 U4.5 U4.4 109.5,70.8 U4.33 ; U4.33@109.75,70.01 U4.33
  Top Layer w0.4: C27.2 126.675,71.749 126.675,70.785 126.675,69.855 C18.1
  Top Layer w0.5: v1(65.96,74.31) 65.97,74.32 65.97,75.5 C36.1 ; C6.1@82.513,76.973 83.53,76.973 ; v1(83.53,75.87) 83.53,76.973 ; C7.1@84.447,76.973 83.53,76.973
  Top Layer w0.7: D1.2 v1(65.976,82.654) ; C34.1 91.308,82.192 v1(91.32,82.18)
  Top Layer w1: v1(116.64,70.78) 116.65,70.77 117.835,70.77 ; C21.2 117.835,71.705 117.835,70.77 ; C12.1 117.835,69.811 117.835,70.77 ; C13.1 119.67,70.77 ; C22.2 119.67,70.77 ; C14.1 121.51,70.77 ; C23.2 121.51,70.77 ; C19.1 128.52,70.785 ; C28.2 128.52,70.785 ; C20.1 130.36,70.785 ; C29.2 130.36,70.785 ; 117.835,70.77 119.67,70.77 ; 119.67,70.77 121.51,70.77 ; 121.51,70.77 125.08,70.77 v1(125.095,70.785) 126.675,70.785 128.52,70.785 ; 128.52,70.785 130.36,70.785
  other v1: 119.4,54.57 122.48,54.6 125.84,54.68 129.17,54.68 70.34,55.63 76.16,56.2 97.38,56.39 99.19,56.39 91.23,56.49 113.5,57.46 125.9,57.45 129.17,57.45 119.4,57.49 122.52,57.49 116.16,57.51 64.45,59.8 67.13,59.78 129.21,60.19 113.23,60.22 119.32,60.3 125.94,60.3 122.55,60.34 82.11,61.17 110.58,61.21 84.38,61.37 93,61.54 83.15,62.77 110.55,62.92 124.19,63.2 121.9,63.24 126.69,63.34 129.25,63.34 104.3,63.88 84.59,64.04 102.53,65.11 126.69,65.09 105.27,65.25 121.86,65.27 119.12,66.89 128.54,66.89 126.67,66.9 130.2,66.9 120.57,66.92 121.96,66.95 108.61,70.01 110.88,70.03 79.82,70.63 123.295,70.77 109.13,71.03 109.78,72.12 108.7,72.14 110.85,72.14 63.8,72.36 68.71,73.01 72.7,73.02 119.28,74.8 121.48,74.8 126.77,74.82 130.27,74.84 117.31,74.85 128.54,74.85 126.77,76.52 121.56,76.69 129.79,78.05 121.56,78.44 126.8,78.44 124.1,78.45 88.62,78.51 90.74,78.5 118.12,78.53 92.89,78.57 77.08,80.39 94.84,81.08 126.13,81.76 129.79,81.79 122.56,81.84 72.63,82.64 94.84,82.97 78.97,85.03 80.85,85.06 82.86,85.09 129.67,86.47 126.05,86.51 122.6,86.55 96.26,86.69 118.9,86.72 104.75,87.05 115.94,88.51 87.47,88.9 88.6,88.9 69.16,89.28 83.99,89.4 118.83,90.16 126.09,90.47 122.56,90.52 129.75,90.54 84,90.83 70.33,91.77 68.08,91.8
ICSPCLK: J2.5 TP7.1 U2.18 | length 21.6
  Top Layer w0.3: J2.5@95.22,59.06 95.22,61.06 92.51,63.77 92.51,71.45 95.435,74.375 U2.18 ; TP7.1 95.31,55.78 95.31,59.05 J2.5
ICSPDAT: J2.4 TP8.1 U2.19 | length 22.6
  Top Layer w0.3: TP8.1 92.77,55.81 92.77,59.05 J2.4 91.58,60.26 91.58,71.79 95.435,75.645 U2.19
IRQ: R17.1 TP12.1 U2.17 | length 14
  Top Layer w0.3: U2.17 97.505,73.105 100.36,75.96 ; v1(97.1,79.26) 97.1,79.22 100.36,75.96 ; R17.1 100.36,75.96
  Bottom Layer w0.3: TP12.1 95.24,79.22 97.06,79.22 v1(97.1,79.26)
Joystick_X: C32.2 R15.1 U2.3 | length 21.8
  Top Layer w0.3: R15.1 81.495,82.115 80.03,80.65 80.03,72.77 81.3,71.5 C32.2 83.32,71.5 83.72,71.9 83.72,72.967 85.128,74.375 U2.3
Joystick_Y: C31.2 R16.1 U2.2 | length 18.1
  Top Layer w0.3: U2.2 84.948,75.645 84.303,75 82.516,75 C31.2 81.564,75.036 81.31,75.29 81.31,79.05 83.09,80.83 87.79,80.83 88.07,81.11 R16.1
M\C\L\R\: J2.1 R14.1 TP9.1 U2.4 | length 30.8
  Top Layer w0.3: R14.1 82.97,55.745 85.13,57.905 ; TP9.1 85.13,57.905 ; U2.4 88.425,73.105 90.77,70.76 90.77,62.53 89.34,61.1 85.84,61.1 85.16,60.42 J2.1 85.13,59.03 85.13,57.905
MCU_LED1: J6.1 U2.9 | length 21.2
  Top Layer w0.3: U2.9 86.737,66.728 89.703,66.728 v1(89.73,66.7) ; v1(96.65,61.81) 103.21,61.81 104.245,60.775 J6.1
  Bottom Layer w0.3: v1(89.73,66.7) 90.5,66.7 95.39,61.81 v1(96.65,61.81)
MCU_LED2: J6.2 U2.8 | length 23
  Top Layer w0.3: U2.8 86.717,68.033 89.743,68.033 v1(89.75,68.04) ; v1(97.06,63.77) 102.45,63.77 105.495,60.725 J6.2
  Bottom Layer w0.3: v1(89.75,68.04) 91.32,68.04 95.59,63.77 v1(97.06,63.77)
MCU_RX: TP5.1 U2.5 U3.1 | length 24.1
  Top Layer w0.3: U3.1 74.87,60.286 75.046,60.11 v1(76.44,60.11) ; v1(83.65,68.47) 84.57,69.39 84.57,71.12 85.285,71.835 U2.5
  Bottom Layer w0.3: v1(76.44,60.11) 76.44,62.63 82.28,68.47 82.6,68.47 ; TP5.1 82.59,68.46 82.6,68.47 ; v1(83.65,68.47) 82.6,68.47
MCU_TX: TP6.1 U2.6 U3.5 | length 26
  Top Layer w0.3: v1(72.48,65.15) 72.48,65.054 72.76,64.774 72.76,64.772 73.157,64.375 U3.5 ; v1(80.54,68.57) 82.28,66.83 83.65,66.83 85.24,68.42 85.24,70.35 85.455,70.565 U2.6
  Bottom Layer w0.3: v1(72.48,65.15) 72.48,67.051 74.079,68.65 80.46,68.65 v1(80.54,68.57) 80.54,69.33 81.31,70.1 TP6.1
MISO: R20.1 TP15.1 U2.15 | length 27.1
  Top Layer w0.3: U2.15 96.127,70.548 98.453,70.548 v1(98.47,70.53) ; v1(100.4,68.66) 102.305,68.66 R20.1
  Bottom Layer w0.3: TP15.1 88.31,76.49 89.02,77.2 98.36,77.2 100.59,74.97 100.59,72.65 v1(98.47,70.53) 98.5,70.53 100.37,68.66 v1(100.4,68.66)
MOSI: R19.1 TP14.1 U2.14 | length 18.3
  Top Layer w0.3: v1(95.94,62.83) 95.56,62.83 93.92,64.47 93.92,68.5 94.715,69.295 98.765,69.295 99.97,70.5 102.285,70.5 R19.1
  Bottom Layer w0.3: v1(95.94,62.83) 95.965,62.805 98.165,62.805 TP14.1
NetANT1_1: R11.1 R12.2 | length 462.9
  Top Layer w0.3: R12.2 136.874,73.14 137.05,73.316 137.05,84.59 138.6,86.14 167.17,86.14 168.75,84.56 v1(168.75,71.96) ; R11.1 136.874,68.43 137.05,68.254 137.05,57.19 138.8,55.44 167.04,55.44 168.75,57.15 168.75,71 168.15,71.6 168.15,84.28 166.89,85.54 138.98,85.54 137.65,84.21 137.65,57.41 139.02,56.04 166.79,56.04 168.15,57.4 168.15,70.81 167.55,71.41 167.55,83.96 166.57,84.94 139.23,84.94 138.25,83.96 138.25,57.62 139.23,56.64 166.57,56.64 167.55,57.62 167.55,70.48 166.95,71.08 166.95,83.65 166.26,84.34 139.5,84.34 138.85,83.69 138.85,57.79 139.4,57.24 166.33,57.24 166.95,57.86 v1(166.95,70.16)
  Bottom Layer w0.3: v1(166.95,70.16) v1(168.75,71.96)
NetC3_2: C3.2 R24.2 U1.1 U1.3 | length 8.3
  Top Layer w0.4: U1.3 75.31,73.32 75.6,73.61 75.6,74.8 75.18,75.22 74.33,75.22 U1.1
  Top Layer w0.5: U1.1@74.33,75.22 74.41,75.3 74.41,75.84 74.82,76.25
  Top Layer w0.7: 74.82,76.25 74.82,77.05 74.857,77.088 74.857,78.862 R24.2
NetC9_2: C9.2 R8.1 TP11.1 Y1.2 | length 18.9
  Top Layer w0.2: Y1.2 106.37,83.1 106.41,83.14 107.77,83.14 108.81,84.18 115.63,84.18 116.5,83.31 TP11.1 ; R8.1 106.39,75.985 Y1.2@106.39,79.54
NetC10_1: C10.1 R10.2 | length 1.8
  Top Layer w0.3: R10.2 117.84,63.221 C10.1
NetC12_2: C12.2 C13.2 C14.2 C15.1 C16.1 C17.1 L1.2 R10.1 | length 12.9
  Top Layer w0.3: L1.2 117.834,68.4 C12.2 ; R10.1 C12.2 ; C17.1 123.4,64.78 C16.1 C15.1 123.386,68.416 C14.2 119.68,68.416 C13.2 C12.2
NetC15_2: C15.2 C16.2 C17.2 C18.2 C19.2 C20.2 R11.2 | length 11.1
  Top Layer w0.3: C17.2 124.81,66.59 C16.2 C15.2 126.66,68.43 C18.2 128.51,68.45 C19.2 130.35,68.44 C20.2 R11.2
NetC21_1: C21.1 C22.1 C23.1 C24.1 C25.1 C26.1 L2.2 | length 11
  Top Layer w0.3: L2.2 117.82,73.12 C21.1 C22.1 119.68,73.12 C23.1 123.38,73.12 C24.1 C25.1 123.39,76.78 C26.1
NetC24_2: C24.2 C25.2 C26.2 C27.1 C28.1 C29.1 R12.1 | length 11.1
  Top Layer w0.3: C26.2 124.8,74.97 C25.2 C24.2 126.646,73.13 C27.1 128.51,73.154 C28.1 130.356,73.144 C29.1 R12.1
NetC30_2: C30.2 D7.2 R13.1 R14.2 SW1.2 | length 20.5
  Top Layer w0.3: D7.2 64.42,57.5 65.11,58.19 66.63,58.19 SW1.2@67.12,57.7 ; SW1.2@67.1,58.19 74.3,58.19 75.88,58.19 76.85,57.22 C30.2 ; R13.1 77.79,59.129 C30.2 ; R14.2 79.519,57.22 C30.2
NetD2_1: D2.1 R1.2 | length 2.1
  Top Layer w0.3: D2.1@79.779,62.811 R1.2
NetD3_1: D3.1 R2.2 | length 2.1
  Top Layer w0.3: R2.2 77.67,64.855 D3.1
NetD4_1: D4.1 R23.2 | length 2.1
  Top Layer w0.5: D4.1 76.91,87.93 77.01,88.03 77.915,88.03 R23.2
NetJ5_2: J5.2 R16.2 | length 3.8
  Top Layer w0.3: R16.2 88.07,84.99 88.65,85.57 J5.2
NetJ5_5: J5.5 R15.2 | length 3.8
  Top Layer w0.3: R15.2 84.301,85.061 84.9,85.66 J5.5
NetJ6_3: J6.3 R4.2 | length 2.5
  Top Layer w0.3: R4.2 106.39,61.14 106.75,60.78 106.75,59.585 J6.3
NetJ6_4: J6.4 R5.2 | length 2.5
  Top Layer w0.3: J6.4 107.995,60.755 108.43,61.19 108.43,61.905 R5.2
NetR1_1: R1.1 U3.14 | length 7.3
  Top Layer w0.3: U3.14 77.435,70.225 79.78,67.88 R1.1
NetR2_1: R2.1 U3.12 | length 4.7
  Top Layer w0.3: U3.12 76.585,68.925 77.65,67.86 R2.1
NetR3_2: R3.2 U2.10 | length 2.7
  Top Layer w0.3: R3.2 86.71,62.805 U2.10
NRSTPD: R22.2 TP17.1 U2.11 | length 9.7
  Top Layer w0.3: U2.11 99.045,65.485 ; v1(100.14,65.07) 100.063,65.147 99.383,65.147 99.045,65.485 ; R22.2 100.36,66.8 99.045,65.485
  Bottom Layer w0.3: v1(100.14,65.07) 100.14,64.962 100.31,64.792 TP17.1
NSS: R21.1 TP16.1 U2.7 | length 24.5
  Top Layer w0.3: U2.7 86.767,69.353 89.693,69.353 v1(89.75,69.41) ; v1(99.52,73.57) 100.09,74.14 R21.1
  Bottom Layer w0.3: v1(89.75,69.41) 89.79,69.37 95.32,69.37 v1(99.52,73.57) 97.78,75.31 TP16.1
RF_IRQ: R17.2 U4.23 | length 6.4
  Top Layer w0.2: R17.2 104.84,75.96 105.38,75.42 105.38,75.04 105.6,74.82 108.09,74.82 108.5,74.41 U4.23
RF_MISO: R20.2 U4.31 | length 3.9
  Top Layer w0.2: R20.2 105.11,68.63 106.28,69.8 U4.31
RF_MOSI: R19.2 U4.30 | length 3.5
  Top Layer w0.2: R19.2 105.86,70.46 106.02,70.3 U4.30
RF_NRSTPD: R22.1 U4.6 | length 8.7
  Top Layer w0.2: R22.1 106.346,66.8 107.01,66.136 109.396,66.136 110.5,67.24 U4.6
RF_NSS: R21.2 U4.24 | length 4.7
  Top Layer w0.2: R21.2 107.86,74.14 107.99,74.01 107.99,73.51 U4.24
RF_OSCIN: C8.2 TP10.1 U4.21 Y1.1 | length 15.9
  Top Layer w0.2: U4.21 109.5,75.8 111.27,77.57 Y1.1@111.27,79.54 ; C8.2@111.28,83.07 111.25,83.04 Y1.1 Y1.1@111.27,79.54 ; TP10.1 115.79,79.54 Y1.1@111.27,79.54
RF_OSCOUT: R8.2 U4.22 | length 3.4
  Top Layer w0.2: R8.2 108.76,75.97 109,75.73 U4.22
RF_RX: C10.2 R9.2 TP18.1 U4.17 | length 19.7
  Top Layer w0.2: U4.17 111.5,74.11 v1(111.98,74.59)
  Top Layer w0.3: v1(114.5,64.79) 114.5,63.295 R9.2 ; R9.2 C10.2 TP18.1
  Bottom Layer w0.3: v1(111.98,74.59) 112.057,74.667 113.828,74.667 115.48,73.014 115.48,65.77 v1(114.5,64.79)
RF_SCK: R18.2 U4.29 | length 4
  Top Layer w0.2: R18.2 104.76,72.29 106.25,70.8 U4.29
RF_TX1: L1.1 TP19.1 U4.11 | length 6
  Top Layer w0.3: U4.11 113.68,70.3 114.45,69.53 L1.1 114.45,67.37 TP19.1
RF_TX2: L2.1 TP20.1 U4.13 | length 6.5
  Top Layer w0.3: U4.13 113.99,71.3 114.45,71.76 L2.1 114.45,74.576 TP20.1@115.304,75.43
RF_VMID: C11.1 R9.1 U4.16 | length 16.3
  Top Layer w0.3: v1(111.13,66.49) 111.813,65.807 112.423,65.807 113.03,65.2 113.03,63.215 R9.1 ; U4.16 112.824,72.8 113,72.976 v1(113,73.64) ; v1@112.98,73.66 C11.1@112.98,76.02
  Bottom Layer w0.3: v1(111.13,66.49) 111.13,67.41 112.39,68.67 112.39,73.03 v1(113,73.64)
SCK: R18.1 TP13.1 U2.16 | length 15.3
  Top Layer w0.3: v1(93.33,70.6) 93.42,70.6 94.655,71.835 U2.16 99.265,71.835 99.72,72.29 R18.1
  Bottom Layer w0.3: TP13.1 90.89,73.04 v1(93.33,70.6)
USB_D_N: D1.4 U3.16 | length 11.4
  Top Layer w0.381: D1.4 65.026,76.401 64.786,76.161 64.786,73.972 65.612,73.145 65.612,70.512 66.528,69.596 67.749,69.596 U3.16
USB_D_P: D1.6 U3.15 | length 10.3
  Top Layer w0.381: D1.6 66.926,76.375 67.134,76.166 67.134,73.952 66.247,73.064 66.247,70.775 66.791,70.231 67.764,70.231 U3.15
pads on no net: J1.4 J2.6 J3.P1 J3.P2 J4.P1 J4.P2 J5.S1 J5.S2 J6.SH1 J6.SH2 U1.4 U3.2 U3.3 U3.6 U3.8 U3.9 U3.10 U3.11 U3.13 U3.19 U3.22 U3.23 U3.24 U3.27 U3.28 U4.1 U4.7 U4.8 U4.19 U4.20 U4.25 U4.26 U4.27 U4.28 U4.32

## Polygon pours and split planes (outlines as drawn)
GND on Bottom Layer "GND_L02_P003" (solid, pour order 3): 130.83,55.94 130.83,53.61 63.92,53.61 cw(c63.92,54.83) 62.7,54.83 62.7,92.3 cw(c63.91,92.3) 63.91,93.51 130.83,93.51 130.83,92.17
GND on Top Layer "GND_L01_P002" (solid, pour order 2): 130.83,56.34 130.83,53.61 63.91,53.61 cw(c63.91,54.82) 62.7,54.82 62.7,92.31 cw(c63.9,92.31) 63.9,93.51 130.83,93.51 130.83,91.78

## Keep-outs
Top Layer:
  rectangle: 115.164,67.64 131.48,73.848

## Silkscreen, mask and mechanical layers (free items; w line width, h text height)
Top Overlay:
  drawing of 26 lines, arcs and shapes, not listed
  text "Buttons" at 114.76,91.152 h1.5
  text "USB" at 74.667,91.128 h1.5
  text "Joystick" at 74.833,89.267 h1.5
  text "RESET" at 68.686,59.162 h1
  text "ICSP" at 86.13,55.783 h1.5
  text "LEDs" at 112.282,54.347 h2
Bottom Overlay:
  region: 165.569,88.316 165.569,88.289 165.569,82.111 155.897,82.111 155.897,91.784 165.569,91.784 hole: 161.045,89.21 157.495,89.21 157.495,88.235 159.229,88.235 159.229,88.208 159.392,88.208 159.392,88.18 159.473,88.18 159.473,88.153 159.527,88.153 159.527,88.126 159.582,88.126 159.582,88.099 159.609,88.099 159.609,88.072 159.663,88.072 159.663,88.045 159.69,88.045 159.69,88.018 159.717,88.018 159.717,87.991 159.744,87.991 159.744,87.964 159.771,87.964 159.771,87.909 159.798,87.909 159.798,87.882 159.825,87.882 159.825,87.828 159.853,87.828 159.853,87.774 159.88,87.774 159.88,87.693 159.907,87.693 159.907,83.737 161.045,83.737 hole: 164.025,90.321 161.045,90.321 161.045,89.21 164.025,89.21
  region: 9 vertices and 30 holes, not listed, extent 137.419,82.111 155.518,91.784
  region: 151.724,84.143 151.724,84.225 151.751,84.225 151.751,84.252 151.779,84.252 151.779,84.279 151.833,84.279 151.833,84.306 152.266,84.306 152.266,83.873 151.779,83.873 151.779,83.9 151.751,83.9 151.751,83.927 151.724,83.927 151.724,84.116
  region: 150.776,83.873 150.776,83.791 150.288,83.791 150.288,83.818 150.234,83.818 150.234,83.845 150.207,83.845 150.207,84.198 150.234,84.198 150.234,84.252 150.261,84.252 150.261,84.279 150.776,84.279 150.776,83.9
  region: 152.266,83.52 152.266,83.195 151.751,83.195 151.751,83.222 151.724,83.222 151.724,83.249 151.697,83.249 151.697,83.574 151.724,83.574 151.724,83.602 151.751,83.602 151.751,83.629 152.266,83.629 152.266,83.547
  region: 149.936,90.321 149.936,89.562 149.909,89.562 149.909,89.535 149.882,89.535 149.882,89.508 149.367,89.508 149.367,89.535 149.34,89.535 149.34,89.562 149.313,89.562 149.313,90.538 149.34,90.538 149.34,90.565 149.367,90.565 149.367,90.592 149.394,90.592 149.394,90.619 149.855,90.619 149.855,90.592 149.909,90.592 149.909,90.538 149.936,90.538 149.936,90.348
  text "Atari Controller REV 01" at 169.64,55.042 h2
Mechanical 1:
  lines w0.1: 169.85,93.56 cw(c169.85,92.29) 171.12,92.29 171.12,54.83 cw(c169.85,54.83) 169.85,53.56 63.89,53.56 cw(c63.89,54.83) 62.62,54.83 62.62,92.29 cw(c63.92,92.29) 63.92,93.59 68.24,93.56 169.91,93.56